# Allegro board OSCILLATOR.brd
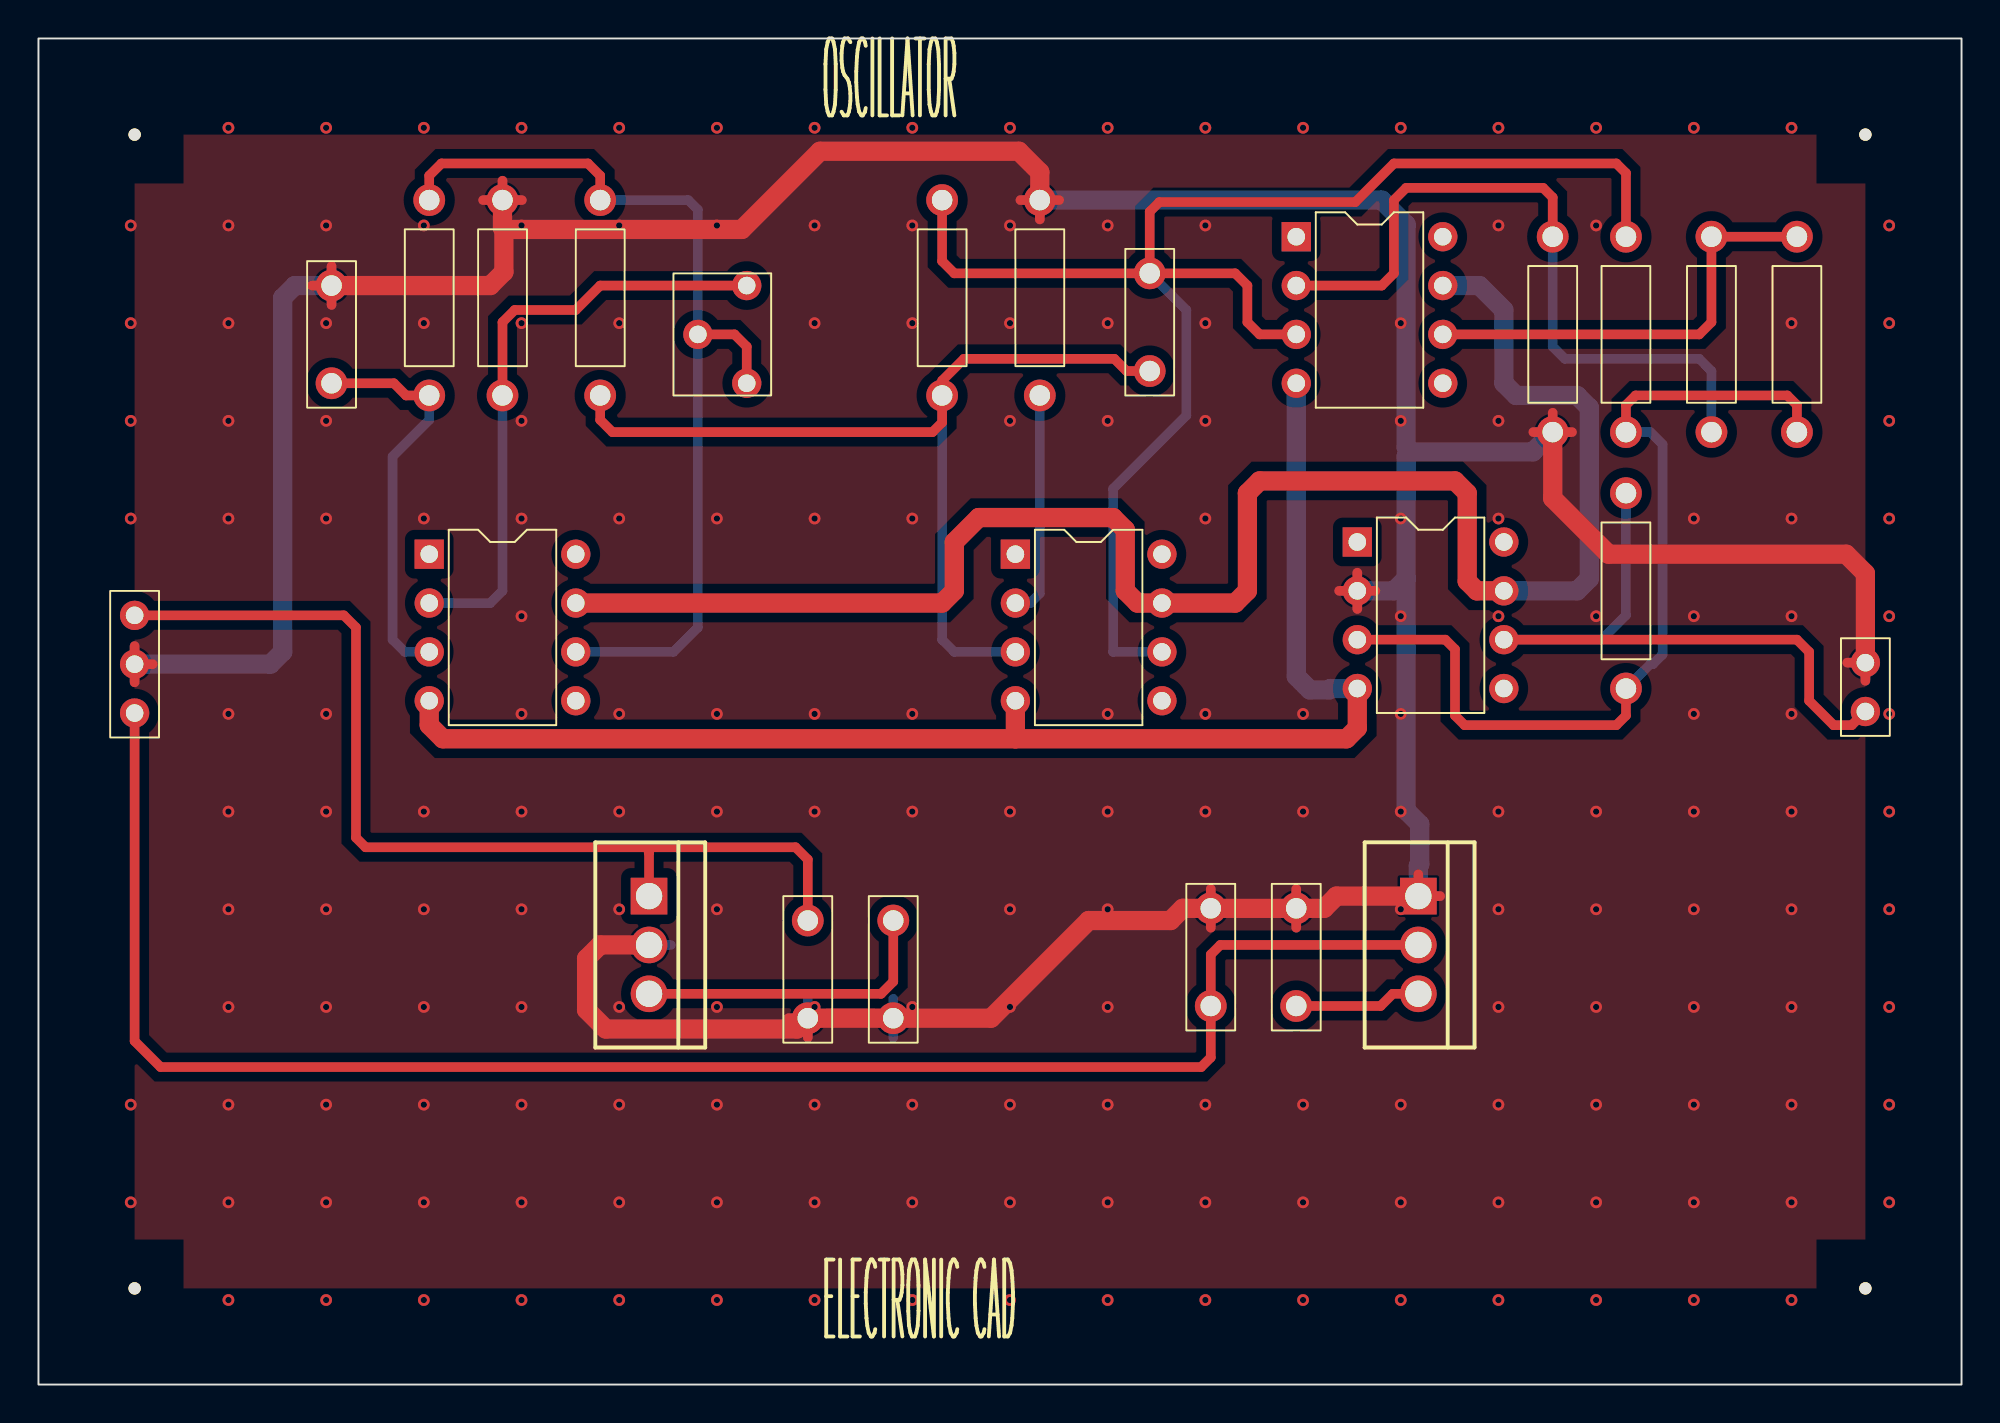
[diagram p0: board, top side]
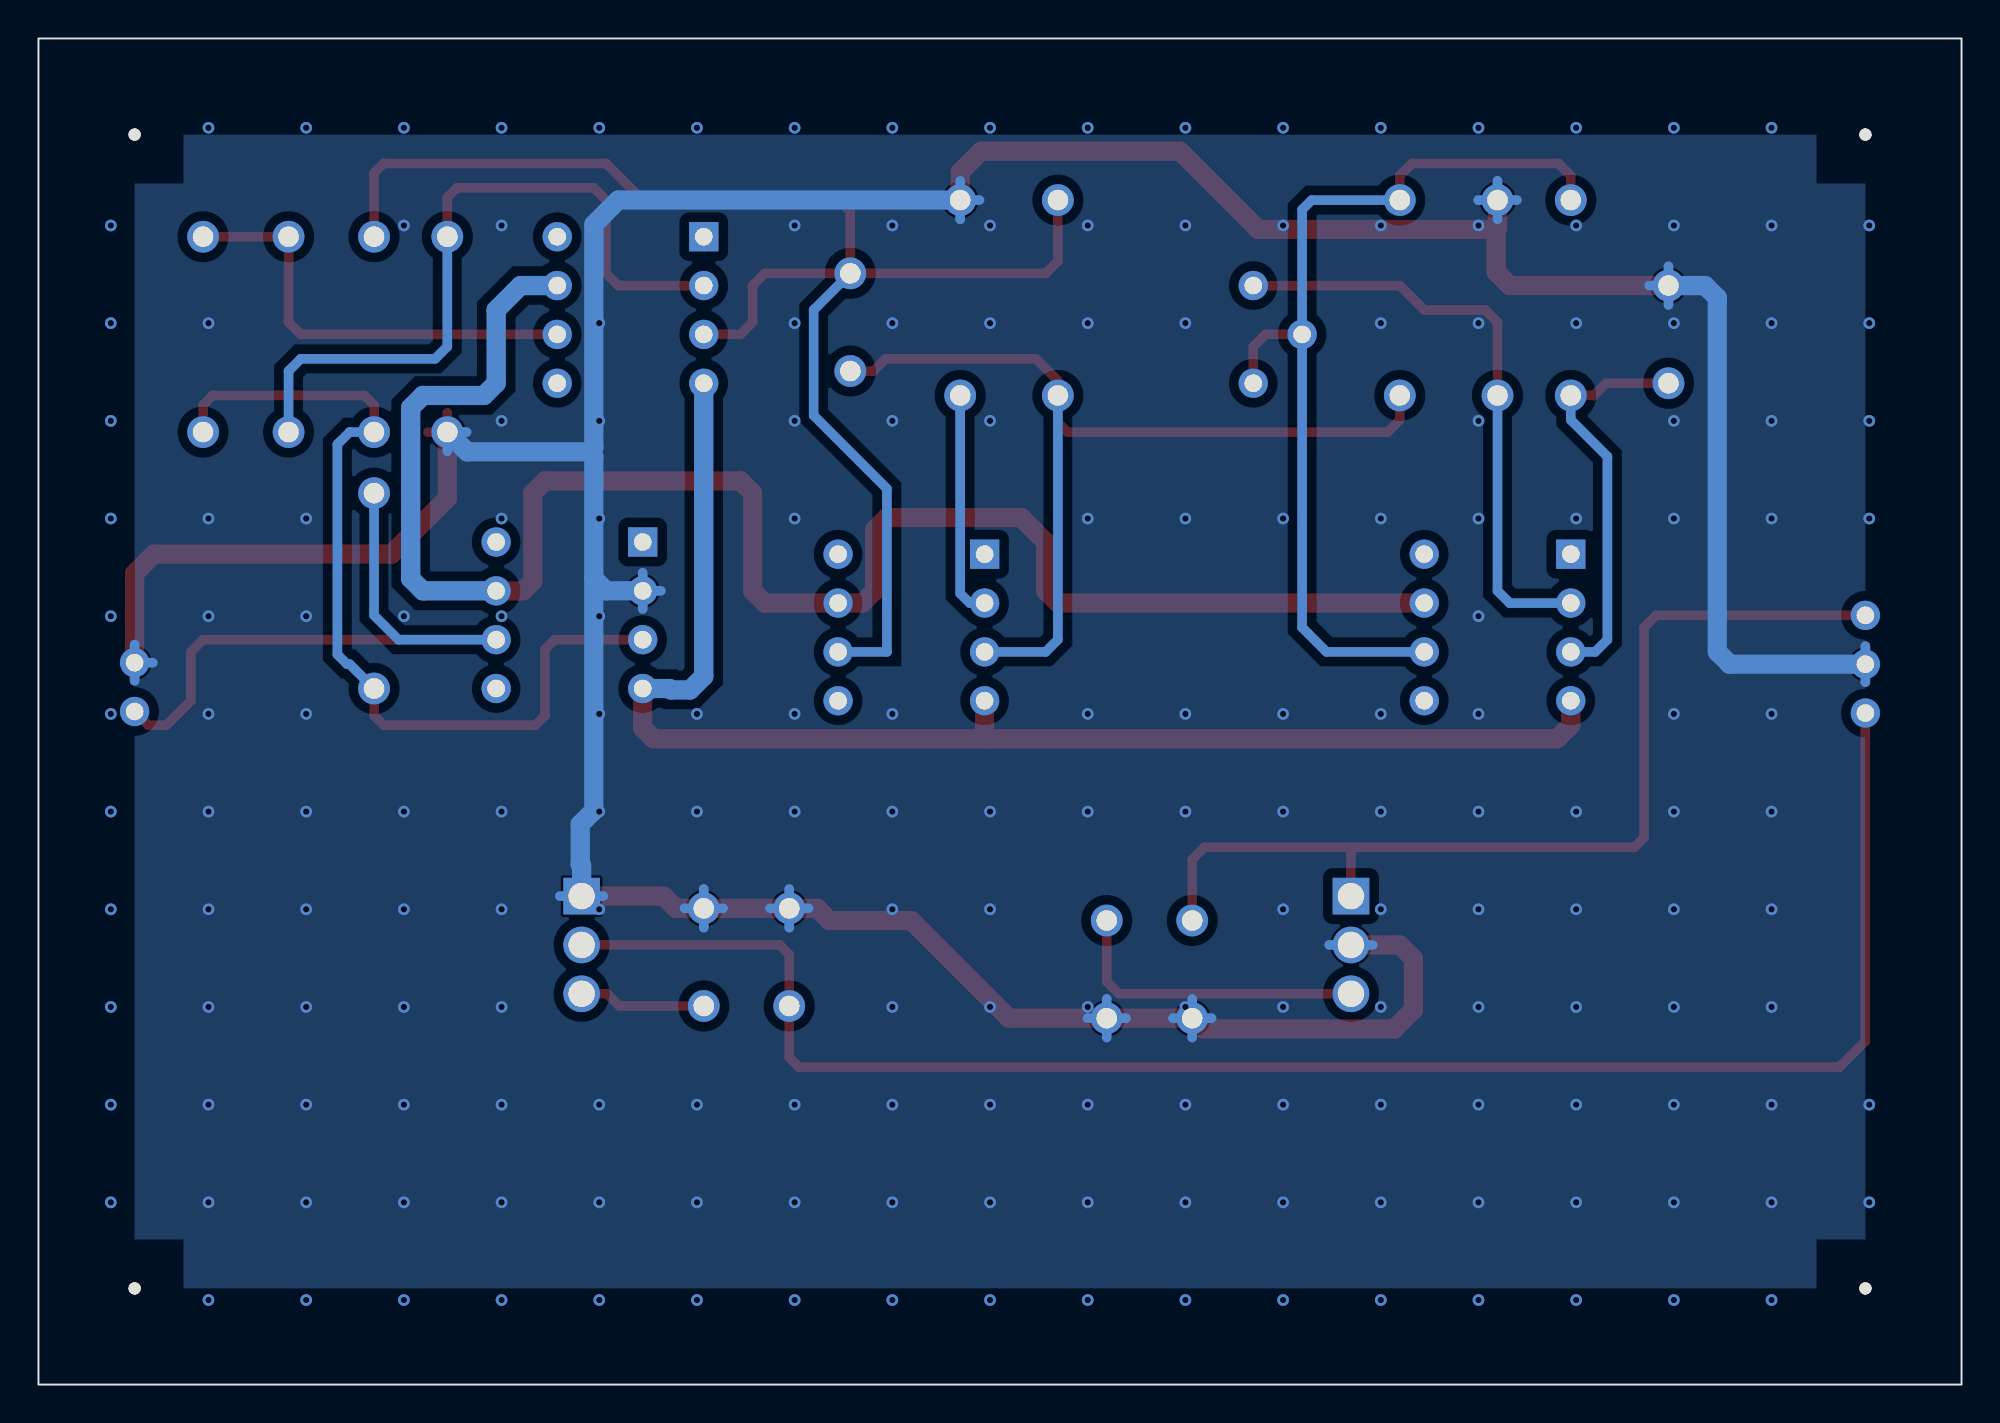
[diagram p1: board, bottom side, seen from below]

Outline 100 x 70 mm; copper layers: TOP, BOTTOM. Coordinates in mm from the lower left corner of the outline.
Outline path: rectangle 0,0 100,70

## Design rules (mm)
constraint set DEFAULT: min track width 0.5
nets with their own width: min track width 1; nets -VCC GND VCC

## Placement (name value [footprint] x y rotation side)
C1  0.00u  [CAPCK06]  57.78 52.7 0 top
C2  270pF  [CAPCK06]  15.24 57.15 180 top
C3  0.1uF  [CAPCK06]  40.01 19.05 0 top
C4  0.1u  [CAPCK06]  44.45 19.05 0 top
C5  0.1u  [CAPCK06]  60.96 19.68 0 top
C6  0.1u  [CAPCK06]  65.41 19.68 0 top
J1  CON2  [JUMPER2]  95 35 90 top
J2  CON3  [JUMPER3]  5 40 270 top
NOREF  -  [unnamed]  5 5 0 top
NOREF#2  -  [#2]  100 0 90 top
NOREF#3  -  [unnamed]  95 5 0 top
NOREF#4  -  [unnamed]  5 65 0 top
NOREF#5  -  [unnamed]  95 65 0 top
NOREF#6  -  [#2]  0 70 0 top
R1  10K  [RES400]  20.32 51.44 0 top
R2  100K  [RES400]  46.99 51.44 0 top
R3  10K  [RES400]  82.55 49.53 0 top
R4  10K  [RES400]  82.55 46.35 180 top
R5  62K  [RES400]  29.21 61.59 180 top
R6  10K  [RES400]  91.44 49.53 0 top
R7  10K  [RES400]  52.07 61.59 180 top
R8  10K  [RES400]  87 59.69 180 top
R9  10K  [RES400]  24.13 61.59 180 top
R10  10K  [RES400]  78.74 49.53 0 top
U1  LF351  [DIP8_3]  20.32 43.18 0 top
U2  LF351  [DIP8_3]  50.8 43.18 0 top
U3  LF351  [DIP8_3]  65.41 59.69 0 top
U4  LF351  [DIP8_3]  68.58 43.81 0 top
U5  LM7812/TO  [TO220AB]  31.75 25.4 270 top
U6  LM7812/TO  [TO220AB]  71.75 25.4 270 top
VR1  1M  [RESADJ]  36.83 57.15 0 top

## Library data of the parts
C1-C6 = CAP NP: Tolerance: ***; User Part Number: ***
J1 = CON2: User Part Number: ***
J2 = CON3: User Part Number: ***
R1-R10 = R: Tolerance: ***; User Part Number: ***
U1-U4 = LF351: Tolerance: ***; User Part Number: ***
U5 = LM7812/TO_1
U6 = LM7812/TO_2
VR1 = RESISTOR VAR: Tolerance: ***; User Part Number: ***

## Footprints (pads in the part's own frame, mm; a bottom-side part is the same pattern mirrored in y, then rotated)
CAPCK06
  round 1.651 hole 1.067: 1(0,0) 2(0,5.08)
DIP8_3
  rect 1.524x1.524 hole 0.914: 1(0,0)
  round 1.524 hole 0.914: 2(0,-2.54) 3(0,-5.08) 4(0,-7.62) 5(7.62,-7.62) 6(7.62,-5.08) 7(7.62,-2.54) 8(7.62,0)
JUMPER2
  round 1.524 hole 0.914: 1(0,0) 2(2.54,0)
JUMPER3
  round 1.524 hole 0.914: 1(0,0) 2(2.54,0) 3(5.08,0)
RES400
  round 1.651 hole 1.067: 1(0,0) 2(0,10.16)
RESADJ
  round 1.524 hole 0.914: 1(0,0) 2(-2.54,-2.54) 3(0,-5.08)
TO220AB
  rect 1.905x1.905 hole 1.372: 1(0,0)
  round 1.905 hole 1.372: 2(2.54,0) 3(5.08,0)
unnamed
  round 0.635 hole 3.175 unplated: (0,0)

## Nets
+12V: C4.2 U5.3(VOUT)
-12V: C6.1 U6.3(VOUT)
-VCC: U1.4(V-) U2.4(V-) U3.4(V-) U4.4(V-)
GND: C2.1 C3.1 C4.1 C5.2 C6.2 J1.2 J2.2 R7.1 R9.1 R10.1 U4.2 U5.2 U6.1
VCC: U1.7 U2.7 U3.7 U4.7
OUT: J1.1 R4.1 U4.6
SIG: C1.2 R2.2 R3.2 U2.6 U3.3
N00659: R9.2 U1.2 VR1.1
N00692: R1.2 R5.1 U1.6 VR1.2(WIPER) VR1.3
N00757: C2.2 R1.1 U1.3
N00779: C1.1 R2.1 R5.2 U2.3
N00891: R7.2 U2.2
N00899: R6.2 R8.1 U3.6
N00921: R3.1 R4.2 R6.1 U4.3
N00971: R8.2 R10.2 U3.2
N01381: C3.2 J2.1 U5.1
N01392: C5.1 J2.3 U6.2

Pads without a net: U1 1 5 8; U2 1 5 8; U3 1 5 8; U4 1 5 8

## Via types
v1: diameter 0.61, hole 0.33, TOP to BOTTOM, 196 vias

## Routing (per net, layer and track width the routed paths; a pad name or vN(x,y) marks a point on that pad's centre or on a via; arc(x,y) is an arc through that point)
+12V: length 16.1
  TOP w0.5: U5.3 43.81,20.32 44.45,20.95 C4.2
-12V: length 6.6
  TOP w0.5: U6.3 70.42,20.32 69.79,19.68 C6.1
-VCC: length 73
  TOP w1: 50.9,35.47 U2.4 50.8,33.58 ; 50.8,33.58 21.03,33.58 20.32,34.29 U1.4 ; 50.8,33.58 68.02,33.58 68.58,34.14 U4.4
  BOTTOM w1: U4.4 67.19,36.2 67.12,36.12 66.11,36.12 65.41,36.83 U3.4
GND: length 287.1
  TOP w0.5: 67.64,41.27 U4.2 ; U4.2 68.58,40.33 ; U4.2 68.58,42.22 ; U4.2 69.52,41.27 ; 71.75,26.53 U6.1 72.89,25.4 ; 95,36.6 J1.2 94.06,37.54 ; 40.01,18.04 C3.1 39,19.05 ; C2.1 15.24,58.16 ; C2.1 15.24,56.14 ; C2.1 14.23,57.15 ; 77.73,49.53 R10.1 ; R10.1 78.74,50.54 ; R10.1 79.75,49.53 ; J2.2 5.94,37.46 ; J2.2 5,38.4 ; J2.2 5,36.52 ; 65.41,23.76 C6.2 65.41,25.77 ; 60.96,25.77 C5.2 60.96,23.76 ; 52.07,60.59 R7.1 ; R7.1 51.06,61.59 ; R7.1 53.08,61.59 ; R9.1 24.13,62.6 ; R9.1 25.14,61.59 ; R9.1 23.12,61.59
  TOP w1: 24.2,60.07 36.57,60.07 40.64,64.14 50.98,64.14 52.07,63.05 R7.1 ; 24.2,60.07 24.2,57.86 23.5,57.15 C2.1 ; 24.2,60.07 24.13,60.14 R9.1 ; J1.2 95,42.18 94,43.18 81.64,43.18 78.74,46.09 R10.1 ; U5.2 29.21,22.86 28.5,22.15 28.5,19.49 29.5,18.49 39.44,18.49 C3.1 C4.1 49.53,19.05 54.61,24.13 58.87,24.13 59.51,24.77 C5.2 C6.2 66.86,24.77 67.49,25.4 U6.1
  BOTTOM w0.5: C5.2 60.96,25.77 ; C5.2 61.97,24.77 ; C5.2 60.96,23.76 ; C5.2 59.95,24.77 ; 40.01,18.04 C3.1 ; C3.1 39,19.05 ; C3.1 41.01,19.05 ; C3.1 40.01,20.06 ; U4.2 68.58,42.22 ; U4.2 67.64,41.27 ; U4.2 68.58,40.33 ; R7.1 52.07,62.6 ; R7.1 52.07,60.59 ; R7.1 51.06,61.59 ; C6.2 66.41,24.77 ; C6.2 64.4,24.77 ; C6.2 65.41,25.77 ; C6.2 65.41,23.76 ; J1.2 95,38.48 ; J1.2 94.06,37.54 ; J1.2 95,36.6 ; 72.89,25.4 U6.1 70.62,25.4 ; 77.73,49.53 R10.1 78.74,48.52 ; 30.62,22.86 U5.2 32.88,22.86 ; R9.1 25.14,61.59 ; R9.1 23.12,61.59 ; R9.1 24.13,60.59 ; R9.1 24.13,62.6 ; 5,36.52 J2.2 5,38.4 ; C4.1 45.46,19.05 ; C4.1 44.45,20.06 ; C4.1 43.44,19.05 ; C4.1 44.45,18.04 ; C2.1 15.24,58.16 ; C2.1 16.25,57.15 ; C2.1 15.24,56.14
  BOTTOM w1: U4.2 70.48,41.27 71.12,41.91 ; 71.12,41.91 71.12,29.84 71.83,29.14 71.83,27.05 71.75,26.98 U6.1 ; 71.12,41.91 71.12,48.26 71.36,48.5 ; 71.36,48.5 77.71,48.5 R10.1 ; 71.36,48.5 71.12,48.74 71.12,60.33 69.85,61.59 R7.1 ; C2.1 13.34,57.15 12.7,56.52 12.7,38.1 12.06,37.46 J2.2
  vias: v1(4.8,60.27) v1(4.8,55.2) v1(4.8,50.12) v1(4.8,45.03) v1(4.8,14.55) v1(4.8,9.47) v1(9.88,65.36) v1(9.88,60.27) v1(9.88,55.2) v1(9.88,50.12) v1(9.88,45.03) v1(9.88,34.88) v1(9.88,29.8) v1(9.88,24.71) v1(9.88,19.64) v1(9.88,14.55) v1(9.88,9.47) v1(9.88,4.39) v1(14.96,65.36) v1(14.96,60.27) v1(14.96,55.2) v1(14.96,50.12) v1(14.96,45.03) v1(14.96,34.88) v1(14.96,29.8) v1(14.96,24.71) v1(14.96,19.64) v1(14.96,14.55) v1(14.96,9.47) v1(14.96,4.39) v1(20.04,65.36) v1(20.04,60.27) v1(20.04,55.2) v1(20.04,45.03) v1(20.04,29.8) v1(20.04,24.71) v1(20.04,19.64) v1(20.04,14.55) v1(20.04,9.47) v1(20.04,4.39) v1(25.12,65.36) v1(25.12,60.27) v1(25.12,55.2) v1(25.12,50.12) v1(25.12,45.03) v1(25.12,39.95) v1(25.12,34.88) v1(25.12,29.8) v1(25.12,24.71) v1(25.12,19.64) v1(25.12,14.55) v1(25.12,9.47) v1(25.12,4.39) v1(30.2,65.36) v1(30.2,60.27) v1(30.2,55.2) v1(30.2,45.03) v1(30.2,34.88) v1(30.2,29.8) v1(30.2,24.71) v1(30.2,19.64) v1(30.2,14.55) v1(30.2,9.47) v1(30.2,4.39) v1(35.28,65.36) v1(35.28,60.27) v1(35.28,45.03) v1(35.28,34.88) v1(35.28,29.8) v1(35.28,24.71) v1(35.28,19.64) v1(35.28,14.55) v1(35.28,9.47) v1(35.28,4.39) v1(40.36,65.36) v1(40.36,60.27) v1(40.36,55.2) v1(40.36,45.03) v1(40.36,34.88) v1(40.36,29.8) v1(40.36,19.64) v1(40.36,14.55) v1(40.36,9.47) v1(40.36,4.39) v1(45.44,65.36) v1(45.44,60.27) v1(45.44,55.2) v1(45.44,45.03) v1(45.44,34.88) v1(45.44,29.8) v1(45.44,19.64) v1(45.44,14.55) v1(45.44,9.47) v1(45.44,4.39) v1(50.52,65.36) v1(50.52,60.27) v1(50.52,55.2) v1(50.52,50.12) v1(50.52,29.8) v1(50.52,24.71) v1(50.52,19.64) v1(50.52,14.55) v1(50.52,9.47) v1(50.52,4.39) v1(55.6,65.36) v1(55.6,60.27) v1(55.6,55.2) v1(55.6,50.12) v1(55.6,34.88) v1(55.6,29.8) v1(55.6,24.71) v1(55.6,19.64) v1(55.6,14.55) v1(55.6,9.47) v1(55.6,4.39) v1(60.68,65.36) v1(60.68,60.27) v1(60.68,55.2) v1(60.68,50.12) v1(60.68,45.03) v1(60.68,34.88) v1(60.68,29.8) v1(60.68,24.71) v1(60.68,14.55) v1(60.68,9.47) v1(60.68,4.39) v1(65.76,65.36) v1(65.76,34.88) v1(65.76,29.8) v1(65.76,24.71) v1(65.76,14.55) v1(65.76,9.47) v1(65.76,4.39) v1(70.84,65.36) v1(70.84,55.2) v1(70.84,50.12) v1(70.84,45.03) v1(70.84,39.95) v1(70.84,34.88) v1(70.84,29.8) v1(70.84,24.71) v1(70.84,14.55) v1(70.84,9.47) v1(70.84,4.39) v1(75.92,65.36) v1(75.92,60.27) v1(75.92,50.12) v1(75.92,45.03) v1(75.92,39.95) v1(75.92,29.8) v1(75.92,24.71) v1(75.92,19.64) v1(75.92,14.55) v1(75.92,9.47) v1(75.92,4.39) v1(81,65.36) v1(81,60.27) v1(81,39.95) v1(81,29.8) v1(81,24.71) v1(81,19.64) v1(81,14.55) v1(81,9.47) v1(81,4.39) v1(86.08,65.36) v1(86.08,45.03) v1(86.08,39.95) v1(86.08,34.88) v1(86.08,29.8) v1(86.08,24.71) v1(86.08,19.64) v1(86.08,14.55) v1(86.08,9.47) v1(86.08,4.39) v1(91.16,65.36) v1(91.16,55.2) v1(91.16,45.03) v1(91.16,39.95) v1(91.16,34.88) v1(91.16,29.8) v1(91.16,24.71) v1(91.16,19.64) v1(91.16,14.55) v1(91.16,9.47) v1(91.16,4.39) v1(96.24,60.27) v1(96.24,55.2) v1(96.24,50.12) v1(96.24,45.03) v1(96.24,39.95) v1(96.24,34.88) v1(96.24,29.8) v1(96.24,24.71) v1(96.24,19.64) v1(96.24,14.55) v1(96.24,9.47)
VCC: length 92
  TOP w1: U1.7 46.99,40.64 47.62,41.27 47.62,43.81 48.9,45.09 55.88,45.09 56.52,44.45 56.52,41.27 57.15,40.64 U2.7 62.23,40.64 62.87,41.27 62.87,46.35 63.5,46.99 73.66,46.99 74.3,46.35 74.3,41.77 74.8,41.27 U4.7
  BOTTOM w1: U3.7 74.93,57.15 76.2,55.88 76.2,52.07 76.83,51.44 80.01,51.44 80.64,50.8 80.64,41.91 80.01,41.27 U4.7
OUT: length 35.6
  TOP w0.5: J1.1 94.29,34.29 93.34,34.29 92.08,35.56 92.08,38.1 91.44,38.73 U4.6
  BOTTOM w0.5: R4.1 82.55,40.01 81.28,38.73 U4.6
SIG: length 81.4
  TOP w0.5: C1.2 57.78,60.99 58.28,61.49 68.48,61.49 70.48,63.5 82.05,63.5 82.55,63 R3.2 ; C1.2 62.23,57.78 62.87,57.15 62.87,55.24 63.5,54.61 U3.3 ; C1.2 47.62,57.78 46.99,58.42 R2.2
  BOTTOM w0.5: C1.2 59.69,55.88 59.69,50.4 55.88,46.59 55.88,38.1 U2.6
N00659: length 31.5
  TOP w0.5: R9.2 24.13,55.24 24.77,55.88 27.94,55.88 29.21,57.15 VR1.1
  BOTTOM w0.5: U1.2 23.5,40.64 24.13,41.27 R9.2
N00692: length 50.6
  TOP w0.5: VR1.3 36.83,53.98 36.2,54.61 VR1.2 ; R1.2 20.32,62.87 20.95,63.5 28.57,63.5 29.21,62.87 R5.1
  BOTTOM w0.5: U1.6 33.02,38.1 34.29,39.37 VR1.2 34.29,61.09 33.79,61.59 R5.1
N00757: length 21
  TOP w0.5: C2.2 18.48,52.07 19.12,51.44 R1.1
  BOTTOM w0.5: R1.1 20.32,50.16 18.41,48.26 18.41,38.73 19.05,38.1 U1.3
N00779: length 50
  TOP w0.5: R5.2 29.21,50.16 29.84,49.53 46.49,49.53 46.99,50.03 R2.1 46.99,52.2 48.12,53.34 55.95,53.34 56.58,52.7 C1.1
  BOTTOM w0.5: U2.3 47.62,38.1 46.99,38.73 R2.1
N00891: length 11.8
  BOTTOM w0.5: U2.2 51.57,40.64 52.07,41.14 R7.2
N00899: length 23.1
  TOP w0.5: U3.6 86.36,54.61 87,55.24 R8.1 R6.2
N00921: length 47.3
  TOP w0.5: U4.3 73.16,38.73 73.66,38.23 73.66,34.79 74.16,34.29 82.05,34.29 82.55,34.79 82.55,36.2 ; R3.1 82.55,50.94 83.05,51.44 90.94,51.44 91.44,50.94 R6.1
  BOTTOM w0.5: R3.1 83.82,49.53 84.45,48.9 84.45,37.97 83.95,37.47 83.82,37.47 82.55,36.2
N00971: length 37.6
  TOP w0.5: R10.2 78.74,61.73 78.24,62.23 71.12,62.23 70.48,61.59 70.48,57.78 69.85,57.15 U3.2
  BOTTOM w0.5: R8.2 87,52.7 86.36,53.34 79.38,53.34 78.74,53.98 R10.2
N01381: length 52.4
  TOP w0.5: J2.1 15.88,40 16.51,39.37 16.51,28.44 17.01,27.94 31.73,27.94 ; 31.73,27.94 39.37,27.94 40.01,27.3 C3.2 ; 31.73,27.94 31.73,27.66 31.75,27.65 U5.1
N01392: length 90.1
  TOP w0.5: U6.2 61.46,22.86 60.96,22.36 C5.1 60.96,17.01 60.46,16.51 6.35,16.51 5,17.86 J2.3

## Copper pours and planes (outline as drawn; the poured copper is in the pictures)
GND on TOP: 95,5 5,5 5,65 95,65
GND on BOTTOM: 95,5 95,65 5,65 5,5

## Text on the board
Ref Des/Silkscreen Top: OSCILLATOR | ELECTRONIC CAD
DEVICE_TYPE_TOP: FIGURE | FINISHED_SIZE | 0.914 | 1.067 | 1.372 | 3.175 | DRILL CHART: TOP to BOTTOM | ALL UNITS ARE IN MILLIMETERS | PLATED | NON-PLATED | QTY | 40 | 32 | 6 | 4
